# Altium PCB PCB_XL6009 DC-DC converter.PcbDoc
Units mil, origin at the board's own origin, x right, y up, seen from the top; angles counter-clockwise.
Board outline 1590 x 1300 mil, 2 copper layers (Top Layer, Bottom Layer); 11 components, 5 nets, 26 pads, 0 vias.
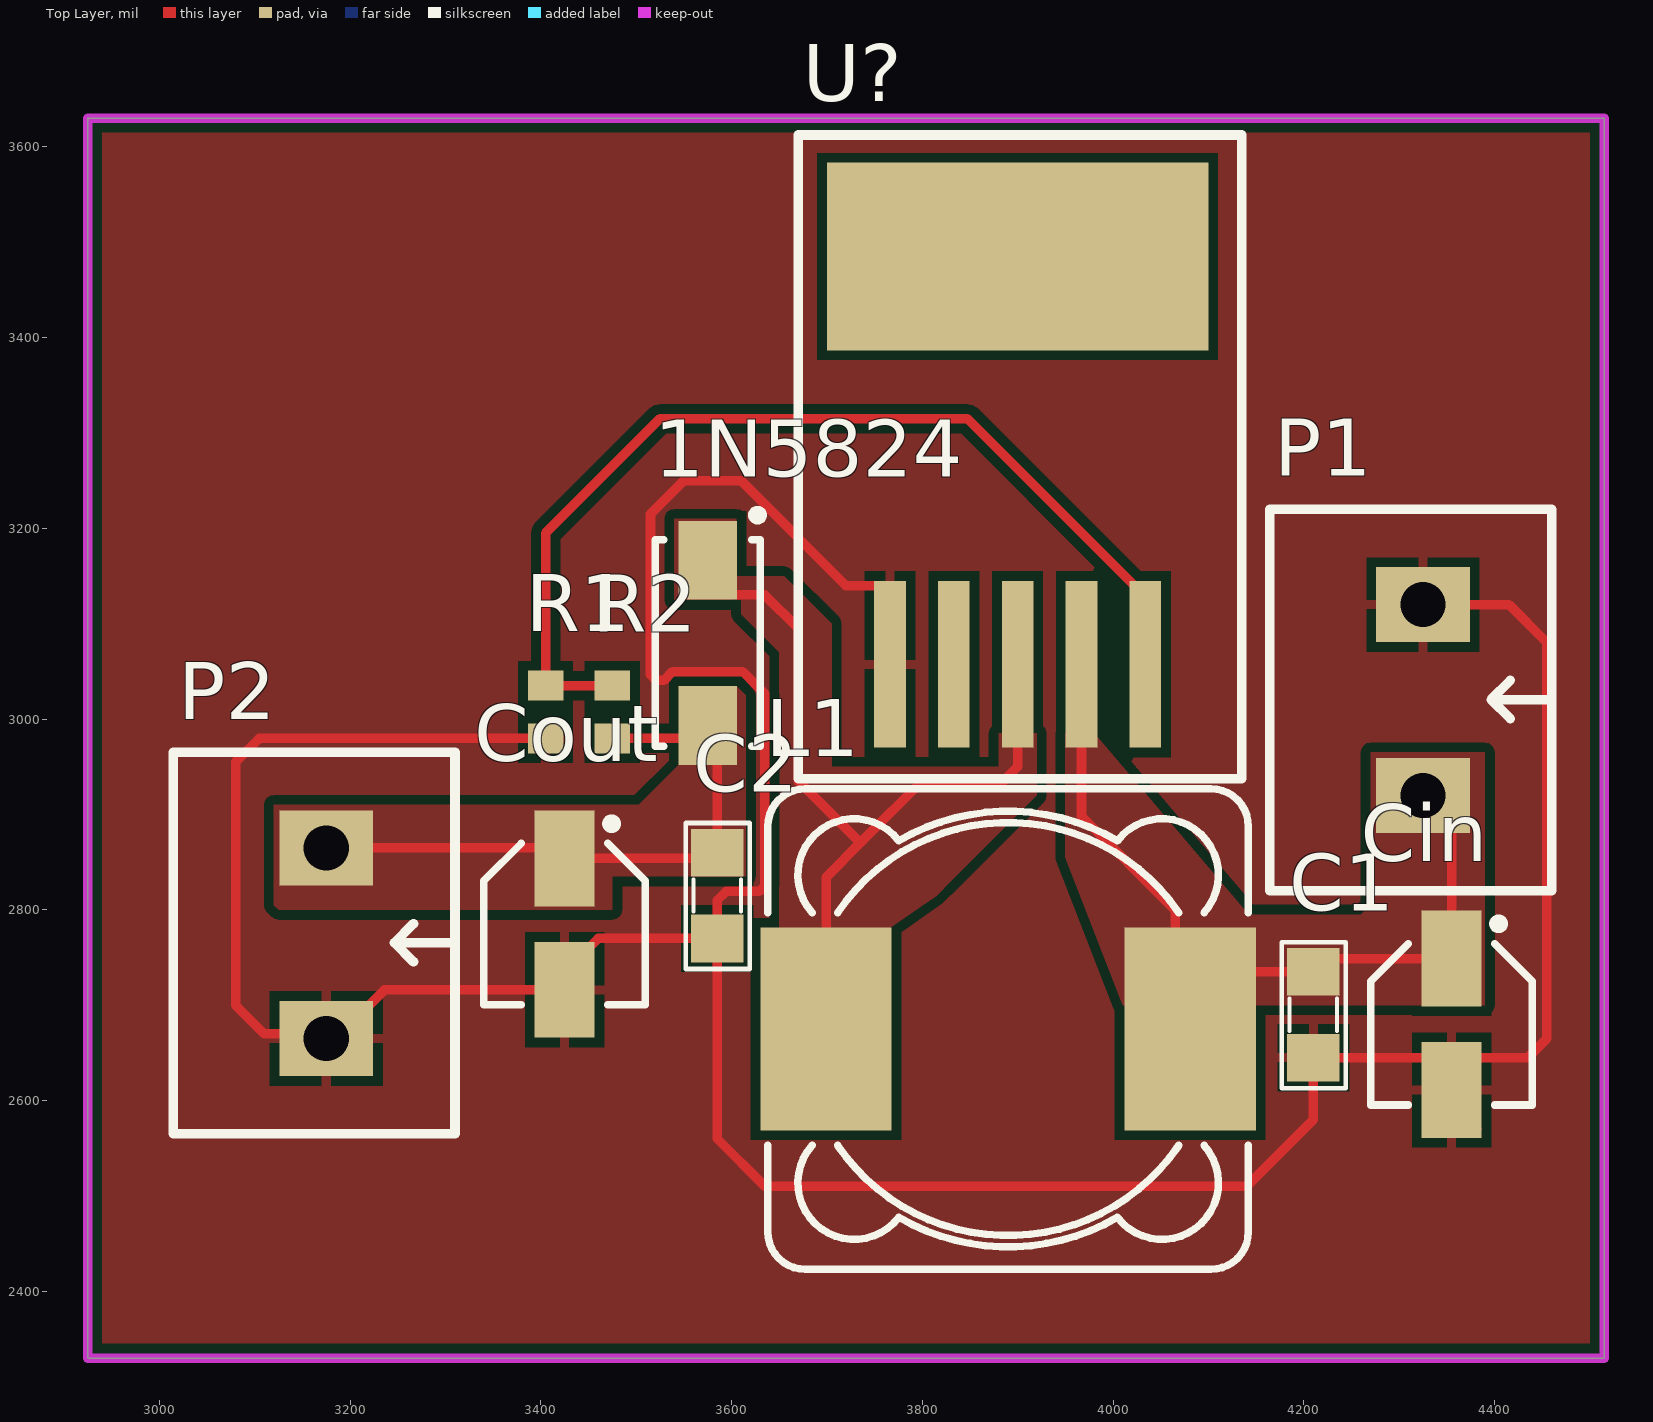
[diagram p0: Top Layer view]
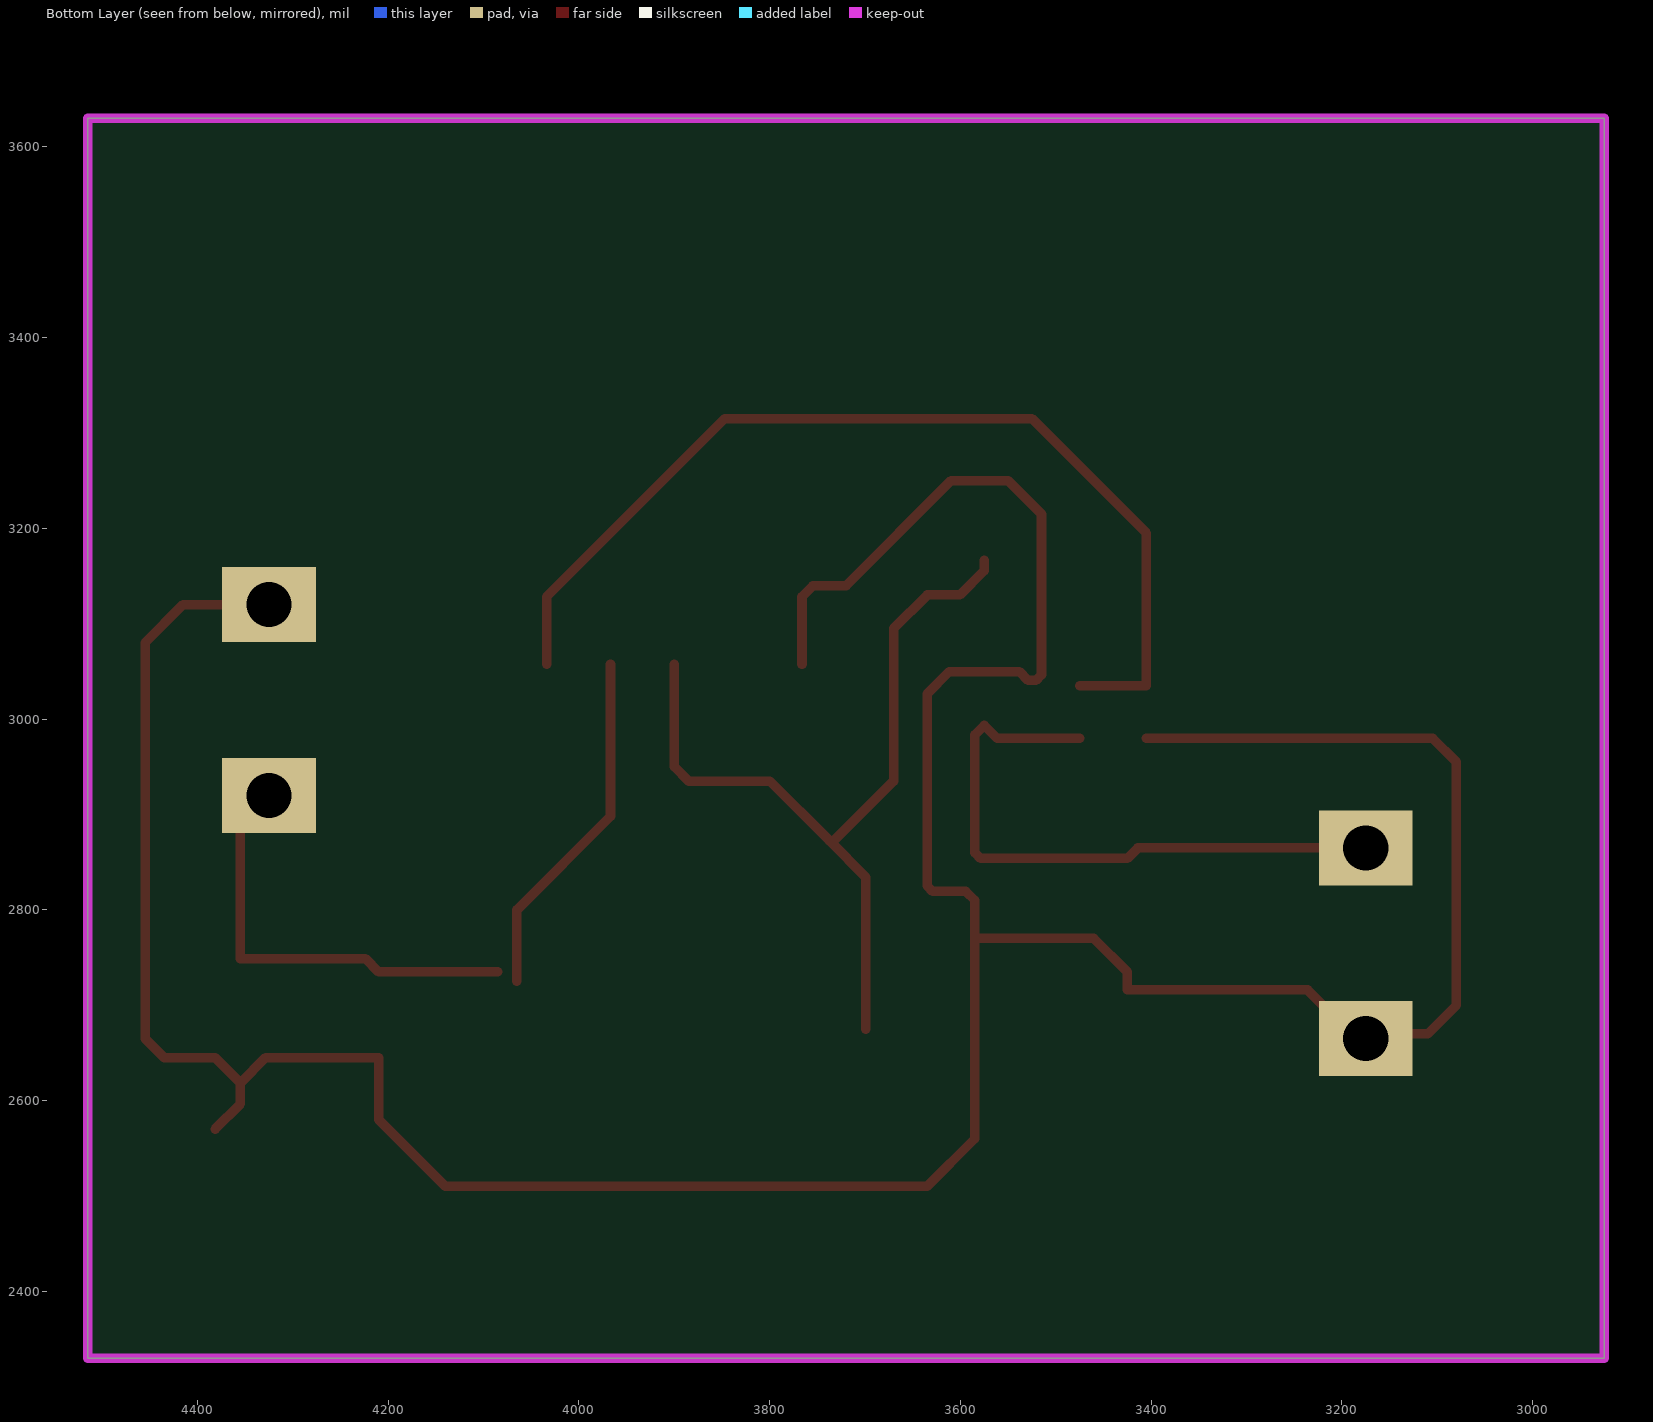
[diagram p1: Bottom Layer view, seen from below]
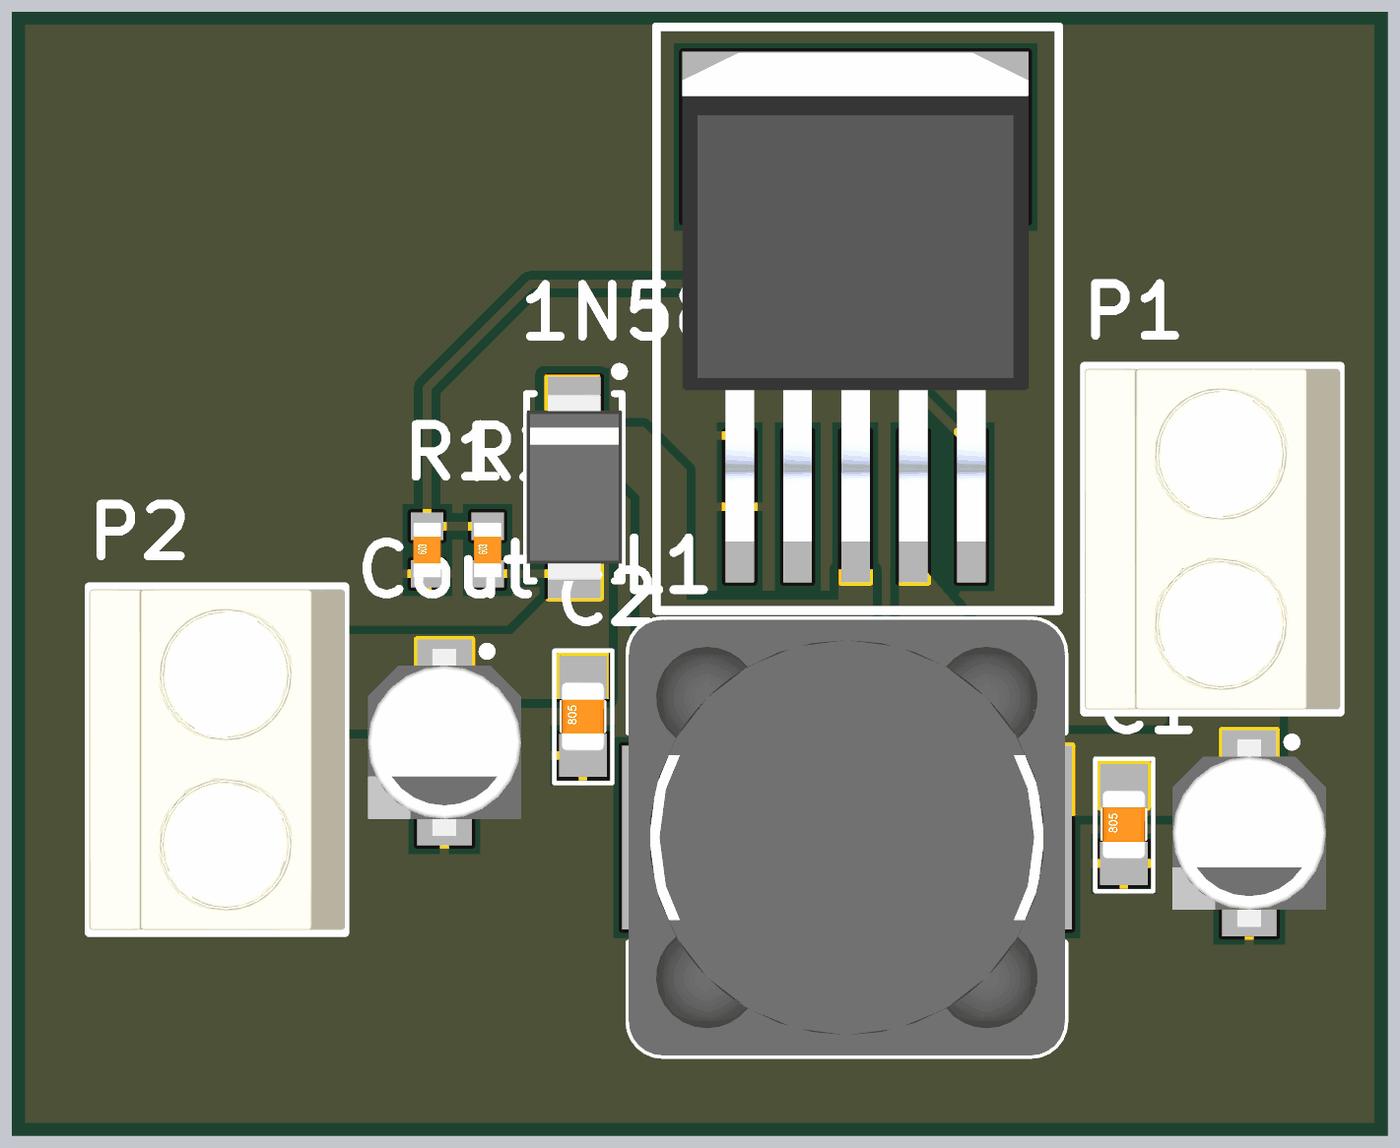
[diagram p2: 3D render of the assembled board from above, using the file's embedded part models]

## Layer stack, top to bottom
Top Solder: solder mask 0.4, Solder Resist, Dk 3.5
Top Layer: signal copper 1.4
Dielectric 1: dielectric 12.6, FR-4, Dk 4.8
Bottom Layer: signal copper 1.4
Bottom Solder: solder mask 0.4, Solder Resist, Dk 3.5

## Board outline
2925,2330 2925,3630 4515,3630 4515,2330

## Design rules (kind name [scope] priority, off if disabled: settings)
Clearance [All] p1: gap=10 ignorepadtopadclearanceinfootprint=FALSE except(0: Arc-Hole Track-Hole SMDPad-Hole THPad-Hole Via-Hole Fill-Hole Poly-Hole Region-Hole Text-Hole)
PolygonConnect PolygonConnect_3 [InNet('Net1N5824_1') vs InNet('Net1N5824_1')] p1: connectstyle=Direct reliefconductorwidth=10 reliefentries=4 polygonreliefangle="90 Angle" airgapwidth=10
PolygonConnect PolygonConnect_2 [InNet('Net1N5824_2') vs InNet('Net1N5824_2')] p2: connectstyle=Direct reliefconductorwidth=10 reliefentries=4 polygonreliefangle="90 Angle" airgapwidth=10
PolygonConnect PolygonConnect_1 [InNet('NetC1_2') vs InNet('NetC1_2')] p3: connectstyle=Direct reliefconductorwidth=10 reliefentries=4 polygonreliefangle="90 Angle" airgapwidth=10
PolygonConnect [All] p4: connectstyle=Relief reliefconductorwidth=10 reliefentries=4 polygonreliefangle="90 Angle" airgapwidth=10
RoutingVias [All] p1: holewidth=28 width=50 viastyle="Through Hole" minholewidth=28 minwidth=50 maxholewidth=28 maxwidth=50
SolderMaskExpansion [All] p1: expansion=4 istentingtop=FALSE
Width [All] p1: maxlimit=10 minlimit=10 preferedwidth=10
30 further rules are at their usual default settings.

## Components (designator, comment, footprint, x,y, rotation, side; value= is the part's Value field where it differs from the comment)
1N5824 "D Schottky" SS34 3575,3080 r270 top
C1 "Cap Non-Pol SMD" CAP-SM-0805 4210,2645 r90 top value=10uF,16V
C2 "Cap Non-Pol SMD" CAP-SM-0805 3585,2770 r90 top value=10uF,16V
Cin "Cap Pol SMD" "CAP ALU SIZE B" 4355,2680 r270 top value=47uF,50V
Cout "Cap Pol SMD" "CAP ALU SIZE B" 3425,2785 r270 top value=220uF,50V
L1 "Inductor" "INDUCTOR 12.5x12.5" 3890,2675 r180 top value=33uH,4A
P1 "Domino 2" "DOMINO 2- 5mm" 4325,3020 r270 top
P2 "Domino 2" "DOMINO 2- 5mm" 3175,2765 r270 top
R1 "RESISTOR SMD" RES-SM-0603 3405,2980.44 r90 top value=1K
R2 "RESISTOR SMD" RES-SM-0603 3475,2980.44 r90 top value=13.8K
U? "XL6009" PCBComponent_1 3900,3057.44 r0 top

## Footprints (in the part's own frame and the unit in brackets; to place one, negate y for a bottom-side part, rotate by r counter-clockwise, add the part's x,y. Pads: shape width x height; smd on the part's side, far side on the other; paste and mask are expansions set on the pad)
"CAP ALU SIZE B" [mm] "Capacitor, Aluminium Electrolytric, 4.3mm L X 4.3mm W X 5.4mm H, IPC Medium Density"
  rect 2.55x1.6 smd: 1(-1.75,0) 2(1.75,0)
  silkscreen extent -2.8,-2.15 2.15,2.15, body extent -2.75,-2.25 2.75,2.25, height 5.7
CAP-SM-0805 [mil]
  rect 50x55 smd: 1(0,0) 2(90,0)
  silkscreen extent -32,-34 121,33, body extent 6,-25 84,25, height 31
"DOMINO 2- 5mm" [mm]
  rect 2x2.5 hole 1.2: 1(-2.54,0) 2(2.54,0)
  silkscreen extent -5.08,-4.08 5.08,3.43, body extent -5,-4.07 5,3.43, height 10
"INDUCTOR 12.5x12.5" [mm] "SMD Inductor  Body Width 12.5mm Body Lenght 12.5mm Height 8mm"
  rect 3.5x5.4 smd: 1(-4.85,0) 2(4.85,0)
  silkscreen extent -6.4,-6.4 6.4,6.4, body extent -6.4,-6.4 6.4,6.4, height 8
PCBComponent_1 [mm]
  rect 0.84x4.44 smd: 1(-3.4,0) 2(-1.7,0) 3(0,0) 4(1.7,0) 5(3.4,0)
  rect 10.16x5 smd: 6(0,10.86)
  silkscreen extent -5.84,-3.05 5.97,14.1, body extent -5.08,-1.02 5.08,13.33, height 4.65
RES-SM-0603 [mm]
  rect 0.8x0.95 smd: 1(-0.014,0) 2(1.386,0)
  body extent -0.11,-0.4 1.49,0.4, height 0.3
SS34 [mm] "DO-214-AC/SMA Molded Diode, Body 5.3x2.6mm, IPC Medium Density"
  rect 2.1x1.55 smd: 1(-2.2,0) 2(2.2,0)
  silkscreen extent -3.52,-1.4 2.75,1.45, body extent -2.75,-1.4 2.75,1.4, height 2.3

## Part data
1N5824: "Schottky Diode", Code_JEDEC=DO-214-AA, LatestRevisionDate=17-Jul-2002, LatestRevisionNote="Re-released for DXP Platform.", PackageDescription="DO-214-AA/SMB; 2 C-Bend Leads; Body 5.3 x 3.6 mm, inc. leads (LxW)", PackageReference=SMB, Published=8-Jun-2000, Publisher="Altium Limited"
C1 C2: "Capacitor"
Cin Cout: "Polarized Capacitor (Radial)"
P1 P2: "Domino, 2-Pin", LatestRevisionDate=17-Jul-2002, LatestRevisionNote="Re-released for DXP Platform.", Publisher="Altium Limited"
R1 R2: "Resistor"

## Nets (pads, with @x,y where several pads share a name; then routed paths per layer and width w, separated by ;. In a path a pad name is that pad's centre, name@x,y a point inside that pad or via, vN(x,y) a via of type N, cw(c..) or ccw(c..) an arc to the next point about the centre after c; other vN are vias at no path point)
GND: C1.1 C2.1 Cin.2 Cout.2 P1.1 P2.2 R1.1 U?.1 | length 3999.1
  Top Layer w10: R1.1 3104.88,2979.88 3080,2955 3080,2700 3110,2670 3170,2670 P2.2 3184.84,2665 3235.94,2716.1 Cout.2 3425,2734.8 3460.2,2770 C2.1 ; U?.1 3766.14,3128.31 3754.61,3139.84 3719.88,3139.84 3609.72,3250 3550,3250 3515,3215 3515,3046.45 3520.86,3040.59 3529.14,3040.59 3538.28,3049.72 3611.72,3049.72 3635,3026.45 3635,2825.25 3629.14,2819.39 3594.39,2819.39 3585,2810 C2.1 ; P1.1 4415,3120 4455,3080 4455,2665 4435,2645 4381.5,2645 Cin.2@4355,2618.5 ; Cin.2@4381.5,2570 4355,2596.5 Cin.2 Cin.2@4355,2618.5 ; C2.1 3585,2560 3635,2510 4140,2510 4210,2580 C1.1 4328.5,2645 Cin.2@4355,2618.5
Net1N5824_1: 1N5824.1 L1.2 U?.3 | length 899.9
  Top Layer w10: 1N5824.1 3575,3155.79 3600.51,3130.28 3634.72,3130.28 3670,3095 3670,2935 3732.5,2872.5 3737.5,2872.5 ; L1.2 3699.06,2834.06 3737.5,2872.5 ; U?.3 3900,2950 3885,2935 3800,2935 3737.5,2872.5
Net1N5824_2: 1N5824.2 C2.2 Cout.1 P2.1 R2.1 | length 660.2
  Top Layer w10: P2.1 3413.9,2865 Cout.1 3578.9,2853.9 C2.2 3585,2983.39 1N5824.2 3561.5,2979.88 R2.1
NetC1_2: C1.2 Cin.1 L1.1 P1.2 U?.4 | length 832.3
  Top Layer w10: U?.4 3966.93,2898.07 4065,2800 L1.1@4065,2725 ; L1.1@4085,2735 C1.2 4223.9,2748.9 Cin.1 4355,2890 P1.2
NetR1_2: R1.2 R2.2 U?.5 | length 1056.8
  Top Layer w10: R2.2 R1.2 3405,3195 3525,3315 3847.17,3315 4033.86,3128.31 U?.5
pads on no net: U?.2 U?.6

## Polygon pours and split planes (outlines as drawn)
GND on Top Layer "GND_L01_P007" (solid, remove dead copper, pour order 7): 2925,2330 2925,3630 4515,3630 4515,2330
Net1N5824_1 on Top Layer "NET1N5824_1_L01_P006" (solid, pour order 6): 3540,3210 3605,3210 3605,3150 3655,3150 3705,3100 3705,2950 3880,2950 3880,2985 3920,2985 3920,2920 3830,2830 3815,2815 3765,2780 3650,2780 3650,3070 3610,3110 3610,3125 3540,3125
Net1N5824_2 on Top Layer "NET1N5824_2_L01_P001" (solid, pour order 1): 3120,2910 3502.44,2910 3545,2952.56 3545,3035 3615,3035 3615,2835 3475,2835 3475,2800 3125,2800 3120,2805
NetC1_2 on Top Layer "NETC1_2_L01_P005" (solid, pour order 5): 4270,2805 4260,2795 4142.56,2795 3980.37,2985 3950,2985 3950,2855 4010,2700 4390,2700 4390,2965 4270,2965

## Keep-outs
Keep-Out Layer:
  lines w10: 2925,2330 2925,2345 2925,2666.25 2925,3308.75 2925,3630 4515,3630 4515,2330 2925,2330